# EAGLE board drill guide (EAGLE 8.6.0)

Size 39.3 x 106.5 mm. Coordinates in mm from the lower left corner, seen from the top.
Outline: 9,26 11,26
Outline: 10,27 10,25
Outline: 10,10 10,8
Outline: 9,9 11,9
Outline: 30,10 30,8
Outline: 29,9 31,9
Outline: 30,27 30,25
Outline: 29,26 31,26
Outline: 29,50 31,50
Outline: 30,51 30,49
Outline: 6,52 8,52
Outline: 7,53 7,51
Outline: 3,63 3,61
Outline: 2,62 4,62
Outline: 12,63 12,61
Outline: 11,62 13,62
Outline: 28,63 28,61
Outline: 27,62 29,62
Outline: 37,63 37,62
Outline: 37,61 37,62
Outline: 37,62 36,62
Outline: 37,62 38,62
Outline: 33,75 33,73
Outline: 32,74 34,74
Outline: 7,75 7,73
Outline: 6,74 8,74
Outline: 5,39 5,37
Outline: 4,38 6,38
Outline: 15,39 15,37
Outline: 14,38 16,38
Outline: 25,39 25,37
Outline: 24,38 26,38
Outline: 35,39 35,37
Outline: 34,38 36,38
Outline: 20,65 20,63
Outline: 19,64 21,64
Outline: 20,77 20,75
Outline: 19,76 21,76
Outline: 5,101 5,100
Outline: 5,100 5,99
Outline: 4,100 5,100
Outline: 5,100 6,100
Outline: 5,88 5,86
Outline: 4,87 6,87
Outline: 15,88 15,87
Outline: 15,87 15,86
Outline: 15,87 14,87
Outline: 15,87 16,87
Outline: 15,101 15,100
Outline: 15,99 15,100
Outline: 15,100 14,100
Outline: 15,100 16,100
Outline: 25,101 25,99
Outline: 24,100 26,100
Outline: 35,101 35,99
Outline: 34,100 36,100
Outline: 35,88 35,86
Outline: 34,87 36,87
Outline: 25,88 25,86
Outline: 24,87 26,87
Outline: circle at 10,26 radius 4
Outline: circle at 10,9 radius 4
Outline: circle at 30,26 radius 4
Outline: circle at 30,9 radius 4
Outline: circle at 30,50 radius 4
Outline: circle at 7,52 radius 3
Outline: circle at 7,74 radius 3
Outline: circle at 33,74 radius 3
Outline: circle at 20,76 radius 2.5
Outline: circle at 20,64 radius 2.5
Outline: circle at 3,62 radius 1.5
Outline: circle at 12,62 radius 1.5
Outline: circle at 28,62 radius 1.5
Outline: circle at 37,62 radius 1.5
Outline: circle at 5,38 radius 1.5
Outline: circle at 15,38 radius 1.5
Outline: circle at 25,38 radius 1.5
Outline: circle at 35,38 radius 1.5
Outline: circle at 5,100 radius 3
Outline: circle at 15,100 radius 3
Copper layers (1*16): Top 0.035mm / dielectric 1.5mm / Bottom 0.035mm
Design rules "default": minimum track width 6mil, minimum drill 0.35mm, track to track 6mil, track to pad 6mil, pad to pad 6mil, via to via 6mil, smd to smd 6mil, copper to edge 40mil, drill to drill 6mil, minimum pad ring 10mil, minimum via ring 8mil, stop-mask expansion 4mil, vias tented up to drill 0mil, thermal gap 10mil

## Placement (x,y rotation side)
U$1  [EURORACK8HPPCB]  -0.5,0 0 top

## Library data of the parts
U$1 = EurorackModularParts

## Text on the board
Dimension: 6mm | 6mm | 6mm | 6mm | 6mm | 6mm | 6mm | 6mm | 5mm | 6mm | 6mm | 5mm | 3mm | 3mm | 3mm | 3mm | 6mm | 8mm | 3mm | 3mm | 3mm | 3mm | 8mm | 8mm | 8mm | 8mm